# Altium PCB BombasFSM.PcbDoc
Units mm, origin at the board's own origin, x right, y up, seen from the top; angles counter-clockwise.
Board outline 100 x 100 mm, 2 copper layers (Top Layer, Bottom Layer); 27 components, 19 nets, 140 pads, 39 vias.
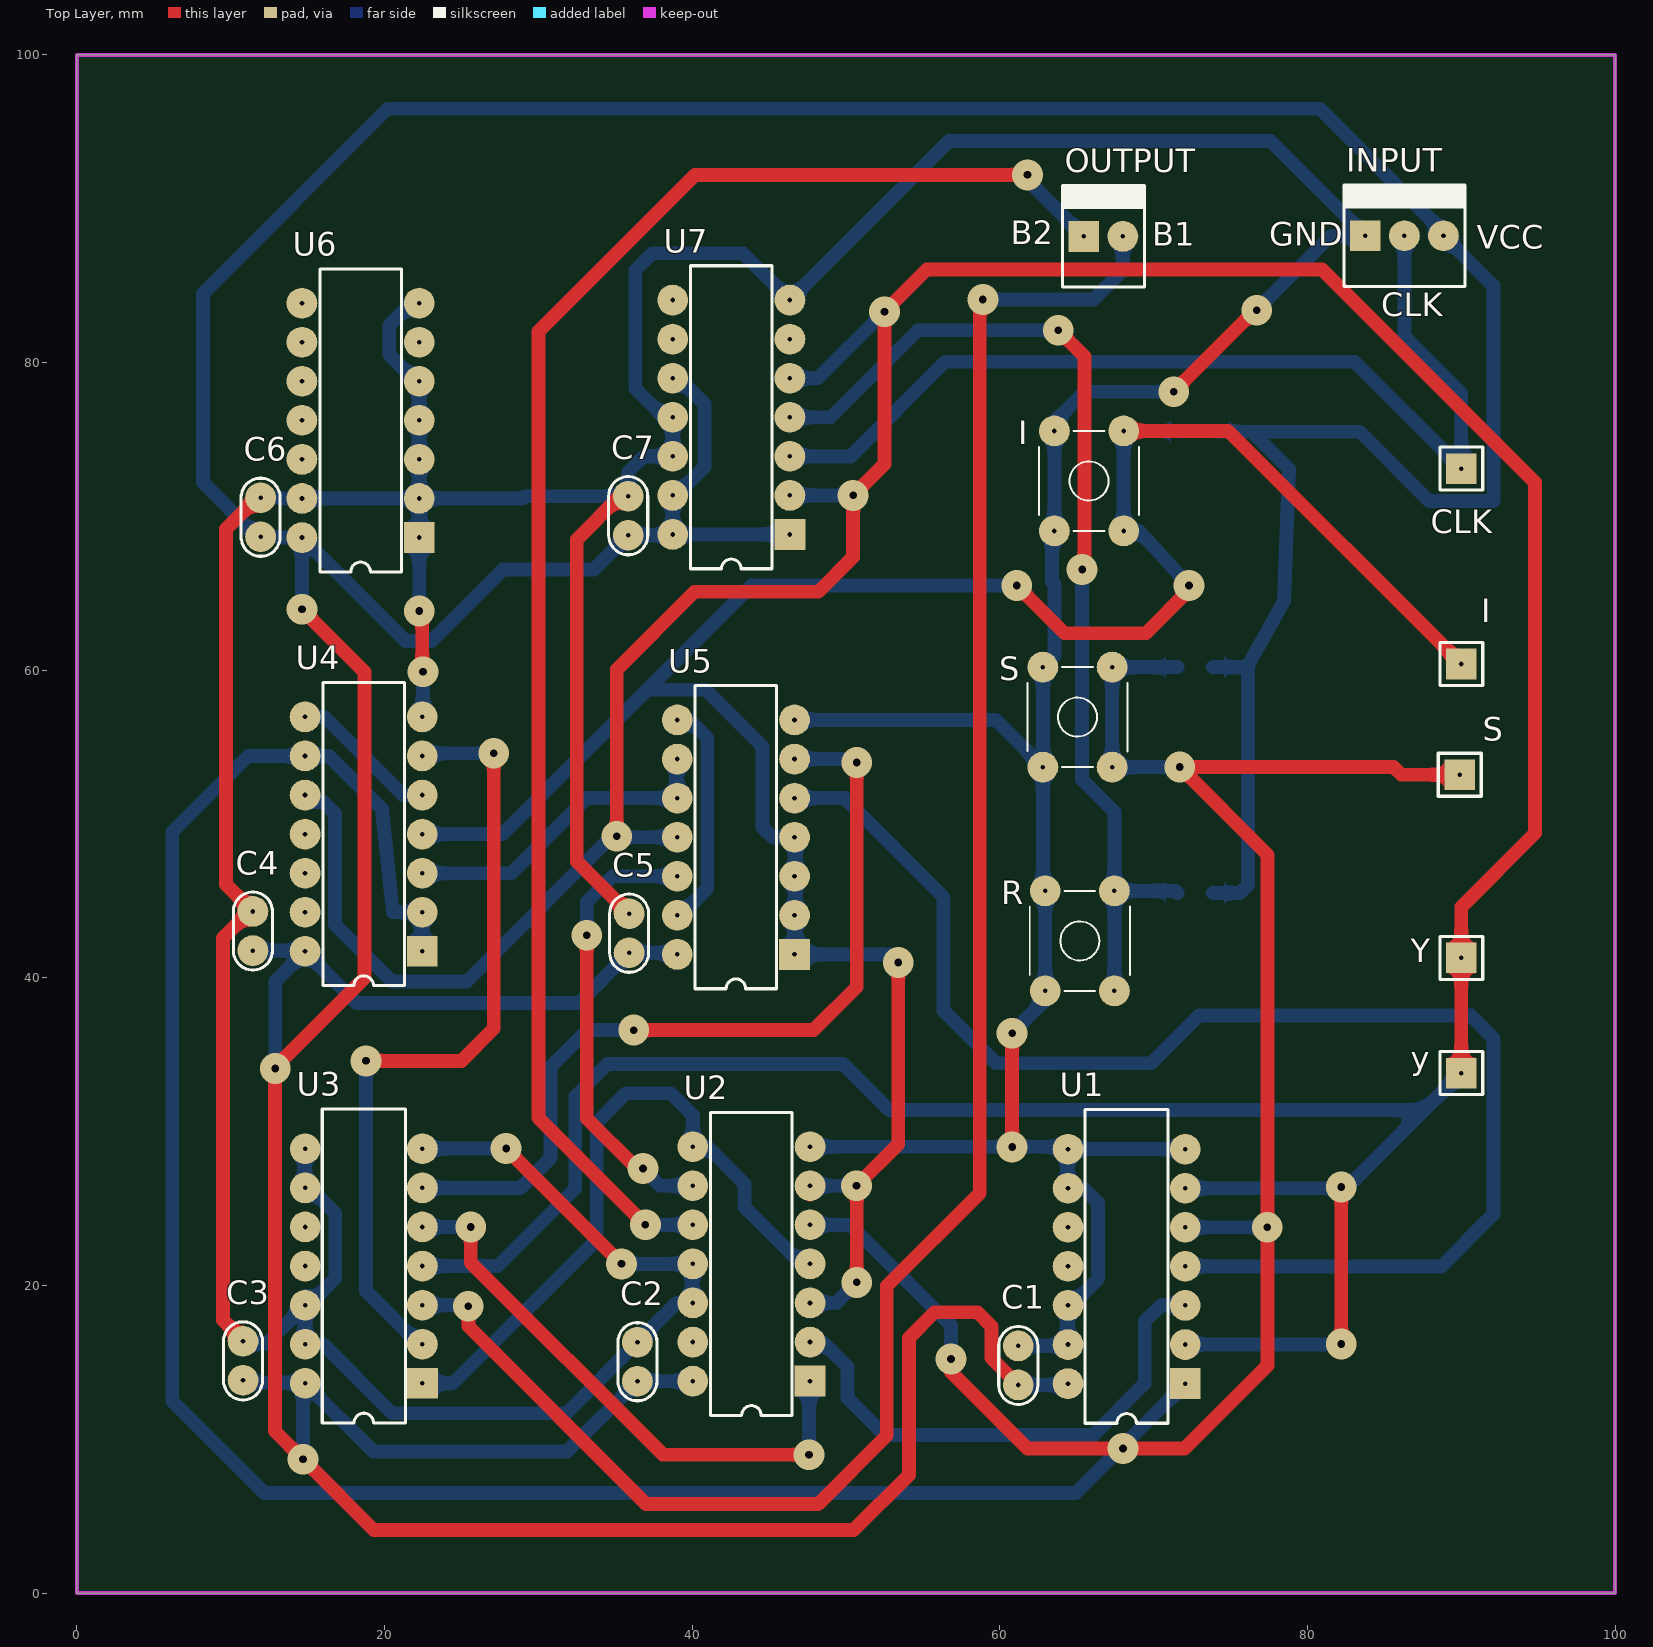
[diagram p0: Top Layer view]
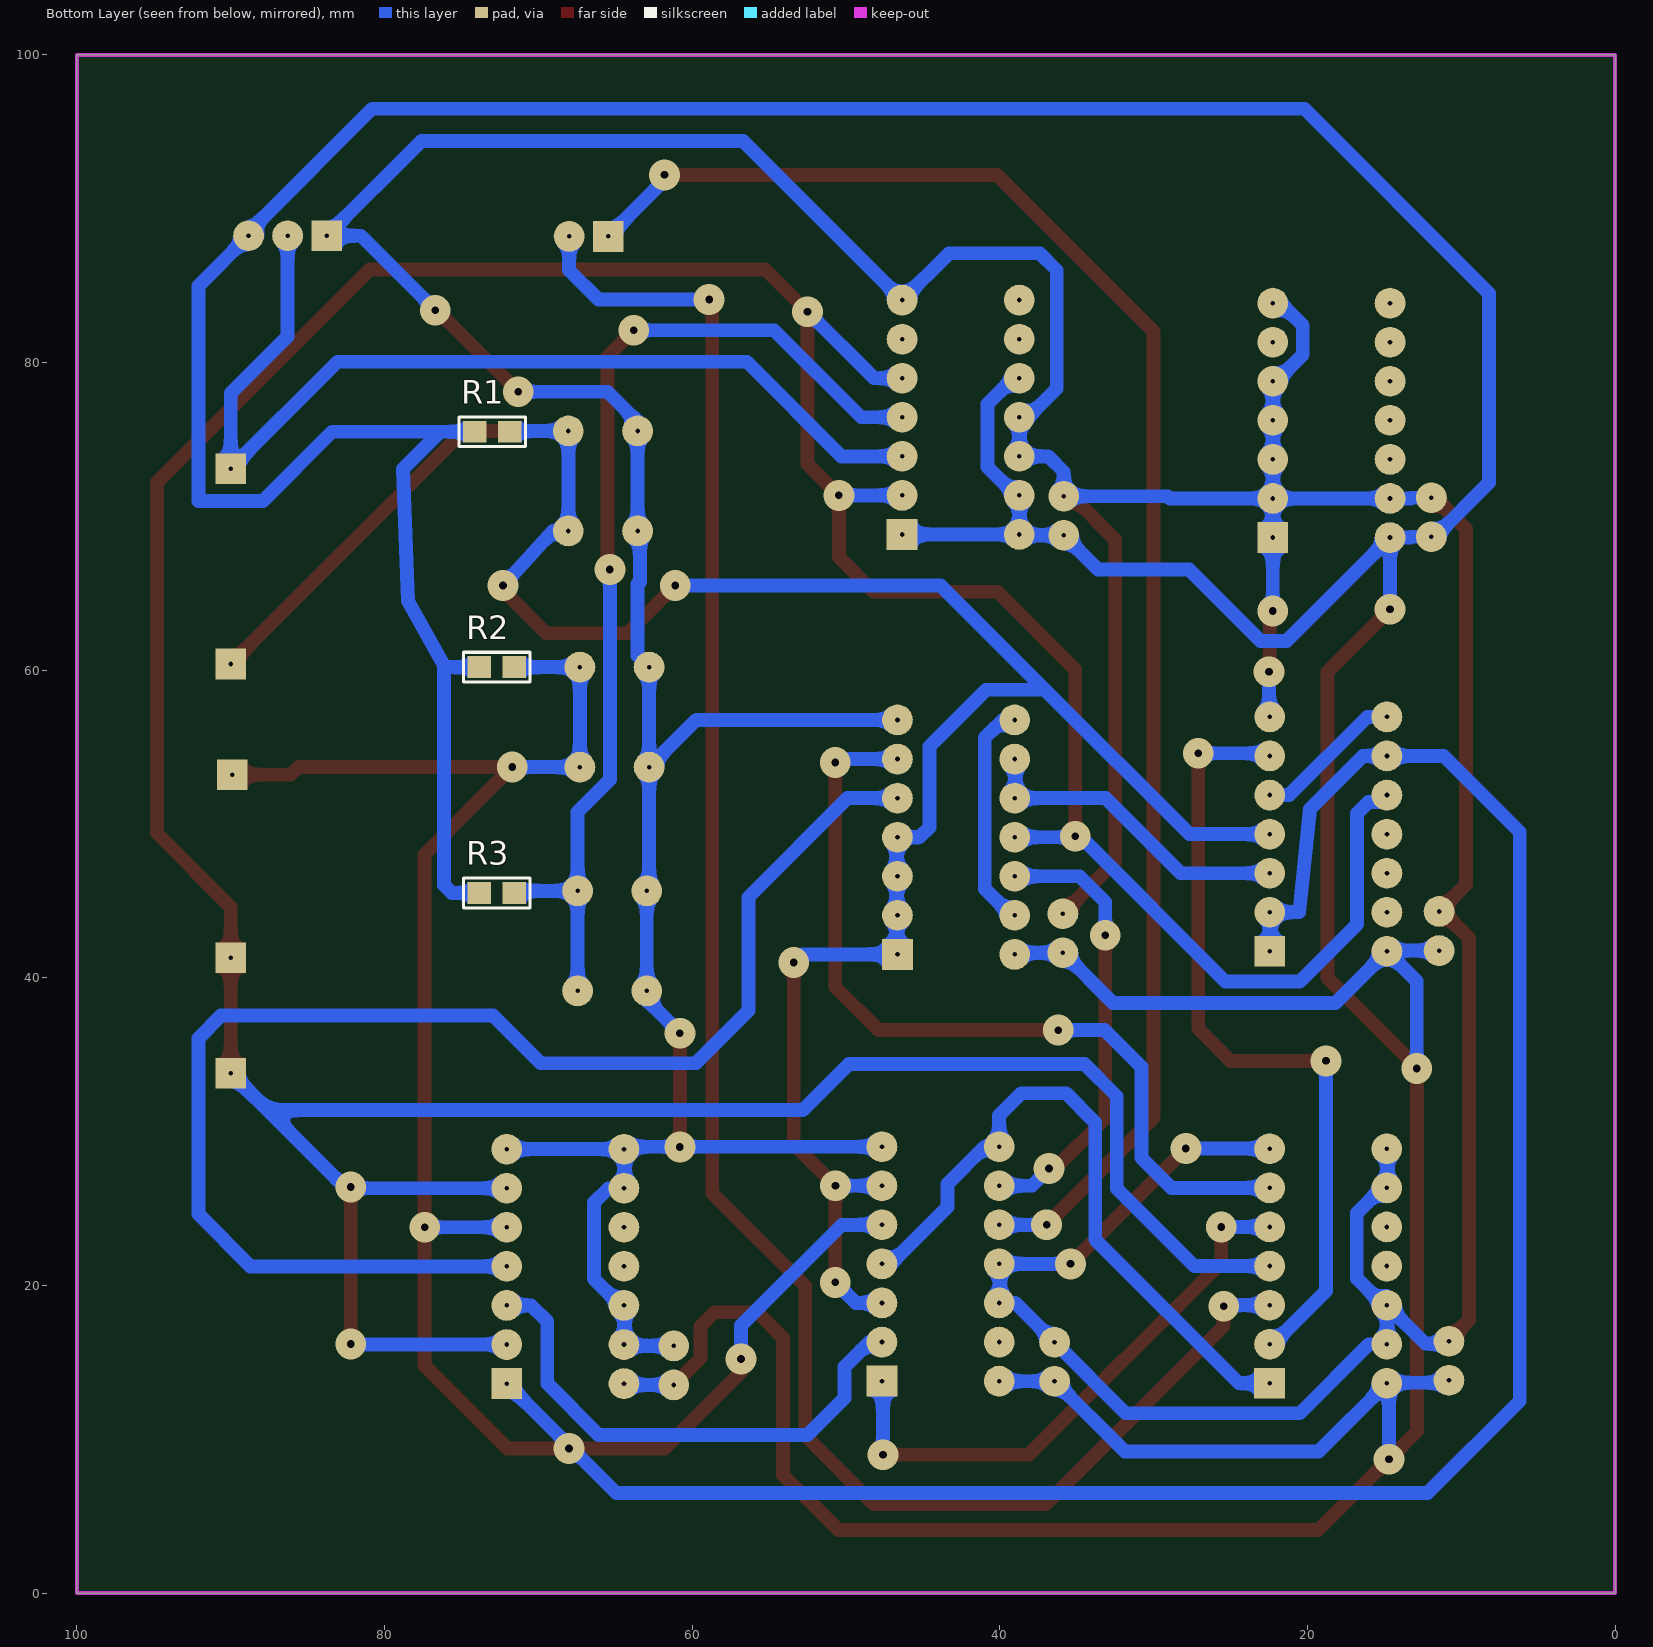
[diagram p1: Bottom Layer view, seen from below]
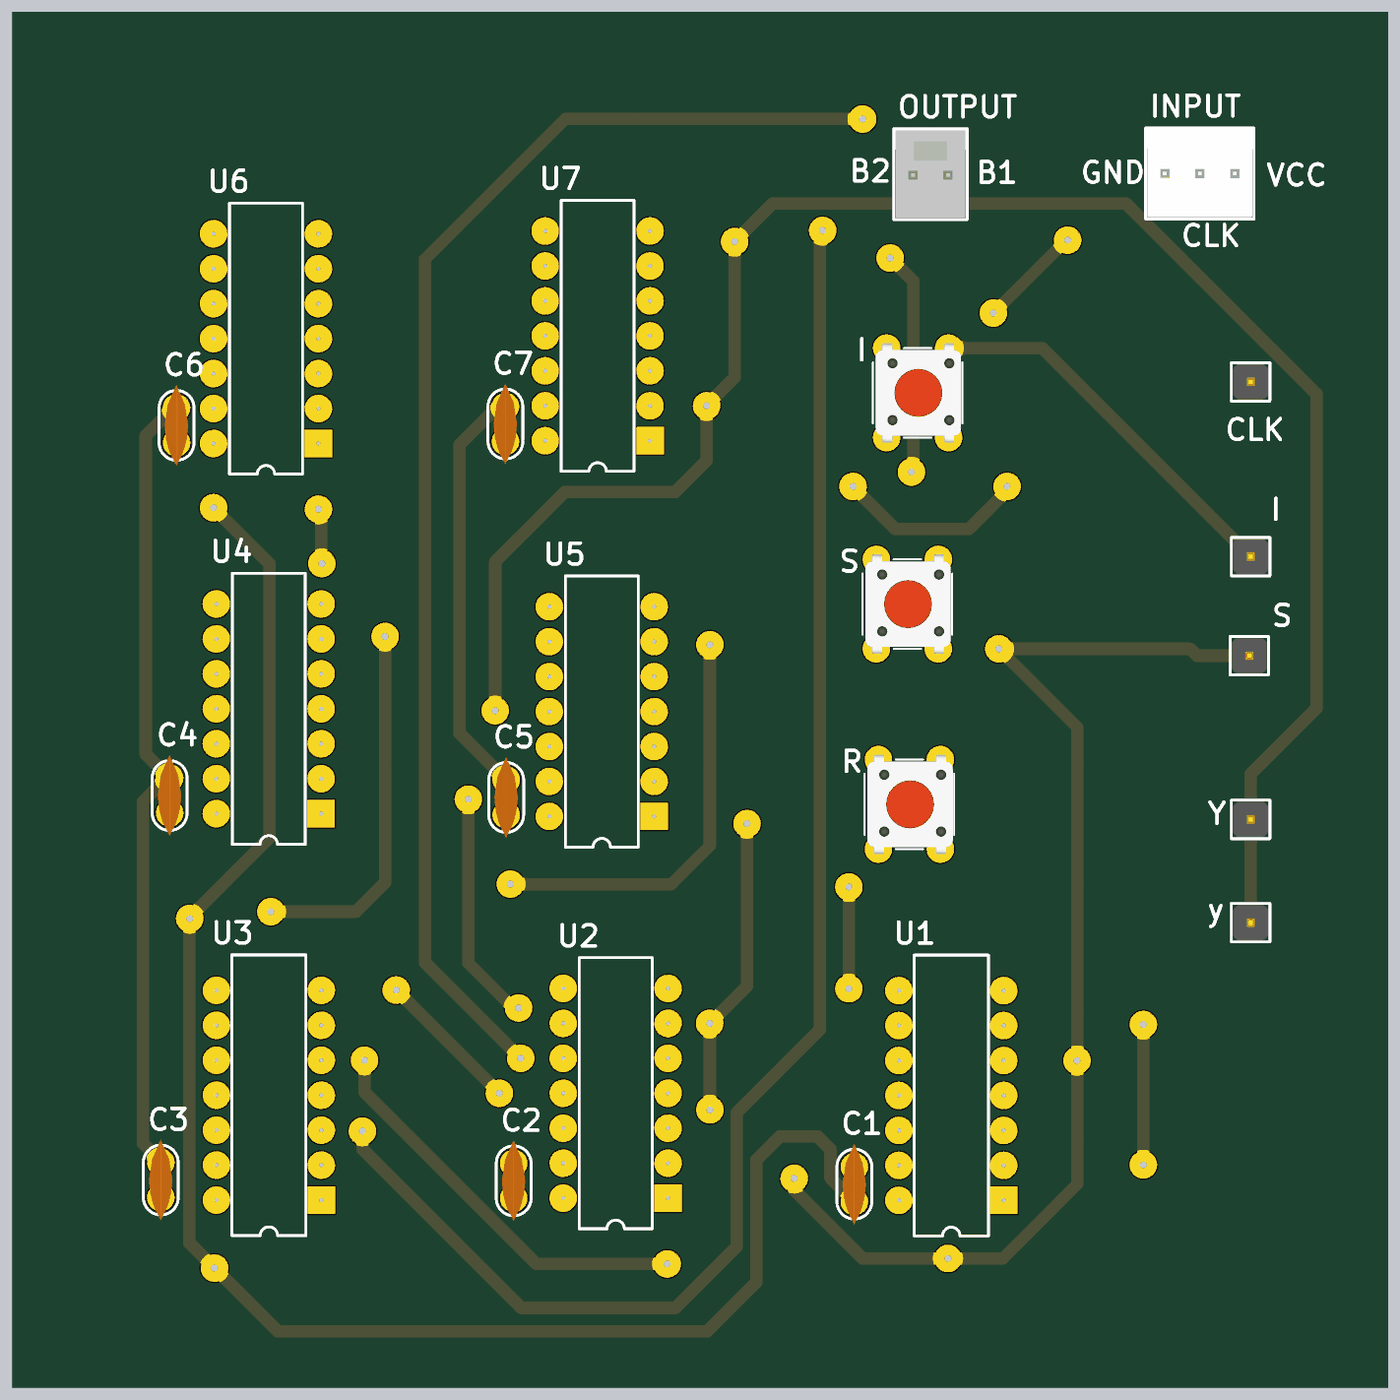
[diagram p2: 3D render of the assembled board from above, using the file's embedded part models]
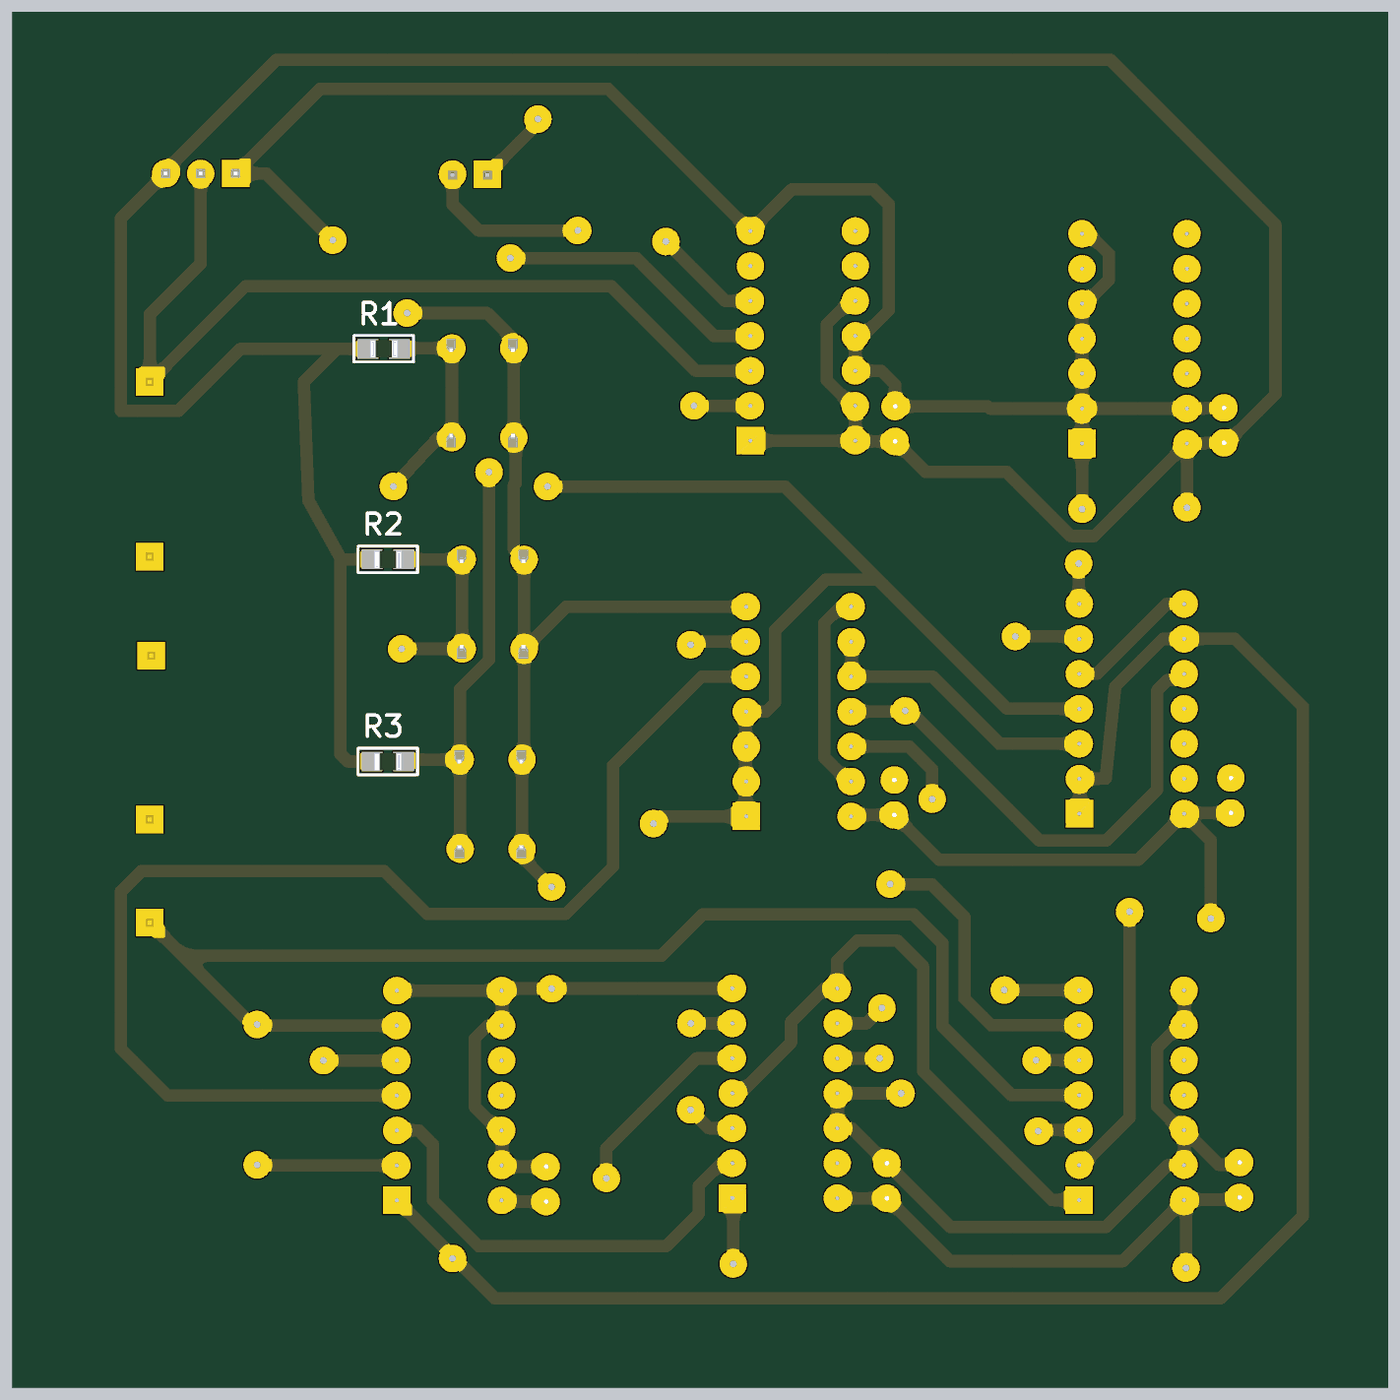
[diagram p3: 3D render of the assembled board from below, using the file's embedded part models]

## Layer stack, top to bottom
Top Solder: solder mask 0.0102, Solder Resist, Dk 3.5
Top Layer: signal copper 0.0356
Dielectric 1: dielectric 0.32, FR-4, Dk 4.8
Bottom Layer: signal copper 0.0356
Bottom Solder: solder mask 0.0102, Solder Resist, Dk 3.5

## Board outline
0,0 100,0 100,100 0,100

## Design rules (kind name [scope] priority, off if disabled: settings)
Clearance [All] p1: gap=0.5 ignorepadtopadclearanceinfootprint=FALSE
PolygonConnect [All] p1: connectstyle=Relief reliefconductorwidth=0.254 reliefentries=4 polygonreliefangle="90 Angle" airgapwidth=0.254
RoutingVias [All] p1: holewidth=0.3 width=2 viastyle="Through Hole" minholewidth=0.3 minwidth=1.5 maxholewidth=0.5 maxwidth=3
SolderMaskExpansion [All] p1: expansion=0.102
Width [All] p1: maxlimit=0.9 minlimit=0.6 preferedwidth=0.9
30 further rules are at their usual default settings.

## Classes and differential pairs
component class BombasFSM: C1 C2 C3 C4 C5 C6 C7 CLK I INPUT OUTPUT R R1 R2 R3 S U1 U2 U3 U4 U5 U6 U7 y Y

## Components (designator, comment, footprint, x,y, rotation, side; value= is the part's Value field where it differs from the comment)
C1 "100n" CAP100 61.2,14.8 r90 top
C2 "100n" CAP100 36.443,15.042 r90 top
C3 "100n" CAP100 10.8,15.1 r90 top
C4 "100n" CAP100 11.443,43.042 r90 top
C5 "100n" CAP100 35.9,42.9 r90 top
C6 "100n" CAP100 11.943,69.942 r90 top
C7 "100n" CAP100 35.843,70.042 r90 top
CLK "CLK" TPTH 90,73.1 r0 top
I "I" TPTH 90,60.4 r0 top
I "I BUTTON" TACTSWITCH 65.8,72.3 r0 top value=PULSADOR
INPUT "MOLEX3" MOLEX3 83.763,88.242 r0 top (schematic designator J1)
OUTPUT "MOLEX2" MOLEX2 65.46,88.2 r0 top (schematic designator J2)
R "RESET BUTTON" TACTSWITCH 65.2,42.4 r0 top value=PULSADOR
R1 "100K" 0805 73,75.5 r0 bottom
R2 "100K" 0805 72.7,60.2 r0 bottom
R3 "100K" 0805 72.7,45.512 r0 bottom
S "S" TPTH 89.9,53.2 r0 top
S "S BUTTON" TACTSWITCH 65.05,56.95 r0 top value=PULSADOR
U1 "MC14070BCL" 632-08 68.243,21.242 r90 top
U2 "MC74HC02AN" 646-06 43.853,21.402 r90 top
U3 "MC14071BCL" 632-08 18.653,21.262 r90 top
U4 "MC74HC00AN" 646-06 18.643,49.342 r90 top
U5 "MC74HC11N" 646-06 42.843,49.142 r90 top
U6 "MC74HC11N" 646-06 18.443,76.242 r90 top
U7 "SN74LS74AN" N014D 42.543,76.442 r90 top value=74LS74
y "y" TPTH 90,33.8 r0 top
Y "Y" TPTH 90,41.3 r0 top

## Footprints (in the part's own frame and the unit in brackets; to place one, negate y for a bottom-side part, rotate by r counter-clockwise, add the part's x,y. Pads: shape width x height; smd on the part's side, far side on the other; paste and mask are expansions set on the pad)
632-08 [mm] "DIP; 14 Leads; Row Spacing 7.62 mm; Pitch 2.54 mm"
  rect 2x2 hole 0.3: 1(-7.62,-3.81)
  round 2 hole 0.3: 2(-5.08,-3.81) 3(-2.54,-3.81) 4(0,-3.81) 5(2.54,-3.81) 6(5.08,-3.81) 7(7.62,-3.81) 8(7.62,3.81) 9(5.08,3.81) 10(2.54,3.81) 11(0,3.81) 12(-2.54,3.81) 13(-5.08,3.81) 14(-7.62,3.81)
  silkscreen extent -10.2,-2.7 10.2,2.7
646-06 [mm] "DIP; 14 Leads; Row Spacing 7.62 mm; Pitch 2.54 mm"
  rect 2x2 hole 0.3: 1(-7.62,-3.81)
  round 2 hole 0.3: 2(-5.08,-3.81) 3(-2.54,-3.81) 4(0,-3.81) 5(2.54,-3.81) 6(5.08,-3.81) 7(7.62,-3.81) 8(7.62,3.81) 9(5.08,3.81) 10(2.54,3.81) 11(0,3.81) 12(-2.54,3.81) 13(-5.08,3.81) 14(-7.62,3.81)
  silkscreen extent -9.85,-2.65 9.85,2.65
0805 [mil] "Pasivo 0805"
  rect 60x56 smd: 1(-45,0) 2(45,0)
  silkscreen extent -85,-38 85,38, body extent -39,-25 39,25, height 15
CAP100 [mm]
  round 2 hole 0.3: 1(-1.27,0) 2(1.27,0)
  silkscreen extent -2.54,-1.27 2.54,1.27, body extent -2.92,-0.84 2.92,0.86, height 6.12
MOLEX2 [mm]
  rect 2x2 hole 0.3: 1(0,0)
  round 2 hole 0.3: 2(2.54,0)
  silkscreen extent -1.4,-3.3 3.94,3.3, body extent -1.27,-3.17 3.81,3.17, height 10.74
MOLEX3 [mm]
  rect 2x2 hole 0.3: 1(0,0)
  round 2 hole 0.3: 2(2.54,0) 3(5.08,0)
  silkscreen extent -1.4,-3.3 6.48,3.3, body extent -1.27,-3.17 6.35,3.17, height 10.74
N014D [mm] "DIP; 14 Leads; Row Spacing 7.62 mm; Pitch 2.54 mm"
  rect 2x2 hole 0.3: 1(-7.62,-3.81)
  round 2 hole 0.3: 2(-5.08,-3.81) 3(-2.54,-3.81) 4(0,-3.81) 5(2.54,-3.81) 6(5.08,-3.81) 7(7.62,-3.81) 8(7.62,3.81) 9(5.08,3.81) 10(2.54,3.81) 11(0,3.81) 12(-2.54,3.81) 13(-5.08,3.81) 14(-7.62,3.81)
  silkscreen extent -9.85,-2.65 9.85,2.65
TACTSWITCH [mm]
  round 2 hole 0.3: 1(-2.25,-3.25) 2(-2.25,3.25) 3(2.25,-3.25) 4(2.25,3.25)
  silkscreen extent -3.25,-3.25 3.25,3.25, body extent -3.05,-3.95 3.15,3.95, height 7
TPTH [mm]
  rect 2x2 hole 0.3: 1(0,0)
  silkscreen extent -1.4,-1.4 1.4,1.4, body extent -1.27,-1.27 1.27,1.27, height 6.04

## Part data
C1 C2 C3 C4 C5 C6 C7: library part CAP
CLK I S y Y: library part TP
I R S: library part "TACT SWITCH"
R1 R2 R3: library part RES
U1: "Quad XOR Gate", ComponentLink1Description="Manufacturer Link", ComponentLink1URL=http://www.onsemi.com/, ComponentLink2Description=Datasheet, ComponentLink2URL=http://www.onsemi.com/pub/Collateral/MC14070B-D.PDF, DatasheetVersion=1995, PackageDescription="DIP; 14 Leads; Row Spacing 7.62 mm; Pitch 2.54 mm", PackageReference=632-08, PackageVersion=1995, Published=15-Apr-2002, Publisher="Altium Limited"
U2: "Quad 2-Input NOR Gate", ComponentLink1Description="Manufacturer Link", ComponentLink1URL=http://www.onsemi.com/site/products/parametrics/0,4446,247,00.html, ComponentLink2Description="Ibis Model", ComponentLink2URL=http://www.onsemi.com/pub/Collateral/MC54HC02AJ.IBS, DatasheetVersion=1989, LatestRevisionDate=06-Jun-2005, LatestRevisionNote="Stylized 3D Model Added", PackageDescription="DIP; 14 Leads; Row Spacing 7.62 mm; Pitch 2.54 mm", PackageReference=646-06, PackageVersion=1997, Published=17-Jul-2002, Publisher="Altium Limited"
U3: "Quad 2-Input OR Gate", ComponentLink1Description="Manufacturer Link", ComponentLink1URL=http://www.onsemi.com/, ComponentLink2Description=Datasheet, ComponentLink2URL=http://www.onsemi.com/pub/Collateral/MC14001B-D.PDF, DatasheetVersion=1995, PackageDescription="DIP; 14 Leads; Row Spacing 7.62 mm; Pitch 2.54 mm", PackageReference=632-08, PackageVersion=1995, Published=15-Apr-2002, Publisher="Altium Limited"
U4: "Quad 2-Input NAND Gate", ComponentLink1Description="Manufacturer Link", ComponentLink1URL=http://www.onsemi.com/site/products/parametrics/0,4446,247,00.html, ComponentLink2Description="Ibis Model", ComponentLink2URL=http://www.onsemi.com/pub/Collateral/MC54HC00AJ.IBS, DatasheetVersion=1989, LatestRevisionDate=06-Jun-2005, LatestRevisionNote="Stylized 3D Model Added", PackageDescription="DIP; 14 Leads; Row Spacing 7.62 mm; Pitch 2.54 mm", PackageReference=646-06, PackageVersion=1997, Published=17-Jul-2002, Publisher="Altium Limited"
U5 U6: "Triple 3-Input AND Gate", ComponentLink1Description="Manufacturer Link", ComponentLink1URL=http://www.onsemi.com/site/products/parametrics/0,4446,247,00.html, ComponentLink2Description="Ibis Model", ComponentLink2URL=http://www.onsemi.com/pub/Collateral/MC54HC11J.IBS, DatasheetVersion=1989, LatestRevisionDate=06-Jun-2005, LatestRevisionNote="Stylized 3D Model Added", PackageDescription="DIP; 14 Leads; Row Spacing 7.62 mm; Pitch 2.54 mm", PackageReference=646-06, PackageVersion=1997, Published=17-Jul-2002, Publisher="Altium Limited"
U7: "Dual D-Type Positive-Edge-Triggered Flip-Flop with Preset and Clear"

## Via types
v1: diameter 2, hole 0.5, Top Layer to Bottom Layer, 39 vias

## Nets (pads, with @x,y where several pads share a name; then routed paths per layer and width w, separated by ;. In a path a pad name is that pad's centre, name@x,y a point inside that pad or via, vN(x,y) a via of type N, cw(c..) or ccw(c..) an arc to the next point about the centre after c; other vN are vias at no path point)
B1: OUTPUT.2 U3.3 | length 126.7
  Top Layer w0.9: v1(25.45,18.65) 25.45,17.35 37,5.8 48.2,5.8 52.65,10.25 52.65,19.97 58.699,26.02 58.699,83.199 58.9,83.4 v1(58.9,84.1)
  Bottom Layer w0.9: U3.3 25.378,18.722 v1(25.45,18.65) ; v1(58.9,84.1) 66.1,84.1 68,86 OUTPUT.2
B2: OUTPUT.1 U2.10 | length 105.6
  Top Layer w0.9: v1(36.957,23.942) 30,30.899 30,82.019 40.181,92.2 v1(61.8,92.2)
  Bottom Layer w0.9: v1(36.957,23.942) U2.10 ; v1(61.8,92.2) 61.8,91.86 OUTPUT.1
CLK: CLK.1 INPUT.2 U7.3 | length 65.7
  Bottom Layer w0.9: U7.3 50.302,73.902 56.45,80.05 83.05,80.05 CLK.1 90,78 86.303,81.697 INPUT.2
GND: C1.2 C2.2 C3.2 C4.2 C5.2 C6.2 C7.2 I.1@63.55,69.05 I.2 INPUT.1 R.1 R.2 S.1@62.8,53.7 S.2 U1.7 U1.8 U1.9 U1.12 U1.13 U2.7 U2.11 U2.12 U3.7 U3.8 U3.9 U3.12 U3.13 U4.7 U5.7 U6.1 U6.2 U6.3 U6.4 U6.5 U6.7 U6.13 U7.7 U7.11 U7.12 | length 422.3
  Top Layer w0.9: C3.2@11.043,16.212 9.493,17.762 9.493,42.58 11.225,44.312 C4.2 9.7,46.055 9.7,69.187 11.725,71.212 C6.2 ; v1@22.453,63.847 22.453,60.547 22.5,60.5 v1(22.5,59.9) ; v1(27.904,28.9) v1(35.402,21.402) ; C7.2 35.312,71.312 32.5,68.5 32.5,47.57 C5.2 ; v1(60.8,29) v1(60.8,36.4) ; v1(71.3,78.1) 76.6,83.4 v1(76.7,83.4)
  Bottom Layer w0.9: C3.2@11.043,16.212 12.333,16.212 U3.12@14.8,18.679 ; C6.2 13.259,71.212 13.309,71.162 U6.13 U6.2 ; U3.12@14.8,18.68 U3.12 ; U3.8 14.8,28.94 14.8,26.4 U3.9 15.158,26.342 16.793,24.707 16.793,20.454 15.651,19.312 14.843,19.312 U3.12 ; v1(22.253,63.847) U6.1 U6.2 ; U6.7 21.762,83.862 20.303,82.403 20.303,80.514 22.035,78.782 U6.5 U6.4 U6.3 U6.2 ; U4.7 22.5,57.009 v1(22.5,59.9) ; U3.7 22.481,28.9 v1(27.904,28.9) ; v1(35.402,21.402) U2.11 40,21.359 40,18.862 U2.12 ; 38.993,18.862 C2.2 31.823,11.692 20.498,11.692 16.008,16.182 U3.13 14.843,16.205 U3.12@14.8,18.679 ; U5.7 59.738,56.762 S.1@62.8,53.7 ; U2.7 64.23,29.022 U1.8@64.39,28.862 ; v1(60.8,36.4) 62.95,38.55 R.1 R.2 62.8,45.8 S.1@62.8,53.7 ; C1.2 64.341,16.07 U1.13 64.39,16.205 64.39,18.659 U1.12 64.651,18.702 66.383,20.434 66.383,25.383 65.444,26.322 U1.9 64.39,26.38 U1.8@64.39,28.862 ; v1(71.3,78.1) 65.5,78.1 63.55,76.15 I.2 63.55,69.05 63.4,68.9 63.4,65.742 63.55,65.592 63.55,60.95 S.2 S.1@62.8,53.7 ; U1.7 U1.8 ; v1(76.7,83.4) 81.542,88.242 INPUT.1 77.605,94.4 56.691,94.4 U7.7 43.315,87.1 37.4,87.1 36.3,86 36.3,78.3 38.158,76.442 U7.11 U7.12 36.847,73.902 35.843,72.898 C7.2 29.106,71.312 28.956,71.162 U6.2 ; U3.12@14.8,18.679 U3.12 ; U1.8@64.39,28.862 64.39,28.92 U1.8 ; U1.8@64.39,28.862 U1.8
I: I.1@90,60.4 I.3 I.4 R1.1 U2.3 U2.6 U4.4 U5.1 U5.2 U5.3 U5.4 | length 177.3
  Top Layer w0.9: U2.6@47.663,25.908 U2.6 ; v1(50.682,26.482) v1@50.7,26.5 ; v1(50.7,20.2) v1@50.7,26.5 ; v1(53.4,41) 53.4,29.2 v1@50.7,26.5 ; v1(61.1,65.5) 64.2,62.4 69.5,62.4 72.3,65.2 v1(72.3,65.5) ; I.4 74.85,75.55 I.1@90,60.4
  Bottom Layer w0.9: U4.4 27.676,49.342 ; U2.3 49.362,18.862 v1(50.7,20.2) ; U2.6 v1(50.682,26.482) ; v1(53.4,41) 52.878,41.522 U5.1 46.71,41.579 46.71,49.085 U5.4 45.212,49.142 44.577,49.777 44.577,55.042 40.894,58.725 37.069,58.725 ; v1(61.1,65.5) 43.844,65.5 37.069,58.725 ; R1.1 71.807,75.55 I.4 I.3 69.05,69.05 v1(72.3,65.5) ; 27.676,49.342 37.059,58.725 37.069,58.725 ; 27.676,49.342 27.686,49.342 37.069,58.725
NetU1_3: U1.3 U2.2 | length 33.9
  Bottom Layer w0.9: U2.2 48.478,16.322 50.1,14.7 50.1,12.687 52.5,10.287 66.091,10.287 69.418,13.614 69.418,17.653 70.467,18.702 U1.3
NetU1_4: U1.4 U5.5 | length 91.7
  Bottom Layer w0.9: U5.5 49.893,51.682 56.337,45.237 56.337,37.863 59.75,34.45 69.86,34.45 72.952,37.541 90.627,37.541 92.1,36.068 92.1,24.638 88.704,21.242 U1.4
NetU2_1: U2.1 U3.5 | length 37.3
  Top Layer w0.9: v1@25.6,23.5 25.6,21.5 38.1,9 v1(47.6,9) ; v1(25.602,23.802) v1@25.7,23.9
  Bottom Layer w0.9: U3.5 v1(25.602,23.802) ; v1(47.6,9) 47.6,13.719 U2.1
NetU2_9: U2.9 U5.12 | length 29.4
  Top Layer w0.9: v1(33.147,42.774) 33.147,30.861 36.408,27.6 v1(36.8,27.6)
  Bottom Layer w0.9: v1(33.147,42.774) 33.147,44.933 34.816,46.602 U5.12 ; v1(36.8,27.6) 37.918,26.482 U2.9
NetU3_2: U3.2 U4.6 | length 51.9
  Top Layer w0.9: v1(18.8,34.6) 25,34.6 27.1,36.7 v1(27.1,54.6)
  Bottom Layer w0.9: v1(18.8,34.6) 18.8,19.627 22.245,16.182 U3.2 ; U4.6 22.631,54.6 v1(27.1,54.6)
NetU3_6: U3.6 U5.6 | length 55.8
  Top Layer w0.9: v1(36.2,36.6) 47.9,36.6 50.7,39.4 v1(50.7,54)
  Bottom Layer w0.9: U3.6 28.842,26.342 30.8,28.3 30.8,34.2 33.2,36.6 v1(36.2,36.6) ; U5.6 50.478,54.222 v1(50.7,54)
NetU4_3: U4.3 U5.9 U5.10 | length 21.2
  Bottom Layer w0.9: U4.3 28.258,46.802 33.138,51.682 U5.10@38.99,51.682 ; U5.10 U5.10@38.99,51.682 ; U5.9 38.99,54.179 U5.10@38.99,51.682
NetU4_5: U4.5 U4.8 | length 9.7
  Bottom Layer w0.9: U4.8 16.114,56.962 21.194,51.882 U4.5
NetU5_8: U5.8 U5.13 | length 14.9
  Bottom Layer w0.9: U5.13 39.251,44.062 40.983,45.794 40.983,55.583 39.804,56.762 U5.8
RESET: R3.1 R.3 R.4 U7.4 | length 68.5
  Top Layer w0.9: v1(63.8,82.1) 65.5,80.4 v1@65.5,66.55
  Bottom Layer w0.9: U7.4 49.01,76.442 54.668,82.1 v1(63.8,82.1) ; v1(65.35,66.55) 65.35,52.892 67.45,50.792 R.4 ; R.3 R.4 ; R3.1 71.419,45.65 R.4
S: R2.1 S.1@89.9,53.2 S.3 S.4 U1.1 U1.5 U2.5 U4.1 U4.2 U4.9 | length 256.7
  Top Layer w0.9: v1(56.825,15.22) 56.825,14.375 61.802,9.398 v1(68.002,9.398) 71.998,9.398 77.4,14.8 v1@77.4,23.8 ; v1(77.382,23.782) v1@77.4,23.8 ; 77.4,25 v1@77.4,23.8 ; 77.4,25.248 77.4,48 v1(71.7,53.7) 85.6,53.7 86.1,53.2 S.1@89.9,53.2 ; v1@77.7,24.1 v1@77.4,23.8
  Bottom Layer w0.9: U4.1 22.41,41.78 U4.2@22.41,44.262 ; U4.2 U4.2@22.41,44.262 ; U2.5 50.277,23.942 56.825,17.394 v1(56.825,15.22) ; R2.1 S.4 S.3 v1(71.7,53.7) ; U1.1 64.938,6.507 12.187,6.507 6.2,12.494 6.2,49.482 11.14,54.422 U4.9 16.393,54.422 19.843,50.972 20.539,44.262 U4.2@22.41,44.262 ; U1.5 v1(77.382,23.782)
S+I: U2.4 U2.8 U3.1 | length 44.1
  Bottom Layer w0.9: U3.1 24.442,13.642 33.8,23 33.8,30.6 35.7,32.5 38.6,32.5 40.043,31.057 U2.8 40.978,29.022 43.4,26.6 43.4,25.1 47.098,21.402 U2.4
VCC: C1.1 C2.1 C3.1 C4.1 C5.1 C6.1 C7.1 INPUT.3 R1.2 R2.2 R3.2 U1.14 U2.14 U3.14 U4.14 U5.14 U6.14 U7.1 U7.10 U7.13 U7.14 | length 441.4
  Top Layer w0.9: v1(12.9,34.1) v1@12.878,34.078 ; v1(14.633,63.956) 18.7,59.889 18.7,40 12.878,34.178 v1@12.878,34.078 ; v1@14.893,8.507 v1(14.7,8.7) ; v1@15,8.3 14.7,8.6 v1(14.7,8.7) ; v1@15.05,8.35 19.3,4.1 50.5,4.1 54.087,7.687 54.087,16.587 55.757,18.257 58.547,18.257 59.463,17.341 59.463,15.267 C1.1 ; v1@12.878,34.078 12.878,10.522 v1(14.7,8.7)
  Bottom Layer w0.9: C3.1@10.8,13.672 14.813,13.672 U3.14 ; C4.1 14.783,41.772 U4.14 ; v1(12.9,34.1) 12.9,39.789 U4.14 ; v1(14.633,63.956) U6.14 ; v1(14.7,8.7) 14.7,13.499 U3.14 ; U7.10 39.118,78.982 40.8,77.3 40.8,73.211 38.951,71.362 U7.13 U7.14 ; U5.14 38.925,41.63 C5.1 32.642,38.372 18.183,38.372 U4.14 ; U2.14 40.033,13.772 C2.1 31.871,9.2 19.285,9.2 U3.14 ; U7.1 U7.14 ; C1.1 64.341,13.53 U1.14 ; R3.2 75.612,45.512 76.143,46.043 76.143,60.3 ; R2.2 76.043,60.2 76.143,60.3 ; R1.2 83.402,75.5 87.909,70.993 92.1,70.993 92.1,84.985 INPUT.3 88.253,88.242 88.253,89.05 80.803,96.5 20.2,96.5 8.197,84.497 8.197,72.2 11.725,68.672 C6.1 13.259,68.672 13.309,68.622 U6.14 ; 76.5,75.4 78.808,73.092 78.476,64.49 76.143,60.3 ; U6.14 21.358,61.897 23.061,61.897 27.712,66.548 33.619,66.548 C7.1 38.683,68.772 U7.14
y: U1.2 U1.6 U3.4 U4.10 U5.11 U7.2 U7.5 Y.1 y.1 | length 301.1
  Top Layer w0.9: v1(35.1,49.2) 35.1,60.041 40.159,65.1 48.2,65.1 50.462,67.362 v1(50.462,71.362) 52.5,73.4 v1(52.5,83.3) 55.25,86.05 80.95,86.05 94.8,72.2 94.8,49.4 90,44.6 Y.1 y.1 ; v1(82.2,16.2) v1(82.2,26.4)
  Bottom Layer w0.9: U4.10 15.28,51.435 16.027,51.435 16.789,50.673 16.789,43.48 20.498,39.772 25.345,39.772 34.715,49.142 v1@35.042,49.142 ; U3.4 27.362,21.262 32.4,26.3 32.4,32.3 34.5,34.4 49.807,34.4 52.807,31.4 87.6,31.4 ; v1@34.8,48.9 v1@35.042,49.142 ; v1(35.1,49.2) v1@35.042,49.142 ; U5.11 v1@35.042,49.142 ; U7.2 v1(50.462,71.362) ; U7.5 48.182,78.982 v1(52.5,83.3) ; U1.2 82.162,16.162 v1(82.2,16.2) ; U1.6 v1@82.1,26.322 ; v1@82.1,26.5 v1(82.2,26.4) 82.6,26.4 y.1@89.3,33.1
pads on no net: U1.10 U1.11 U2.13 U3.10 U3.11 U4.11 U4.12 U4.13 U6.6 U6.8 U6.9 U6.10 U6.11 U6.12 U7.6 U7.8 U7.9

## Keep-outs
Keep-Out Layer:
  the board outline again, w0.254

## Silkscreen, mask and mechanical layers (free items; w line width, h text height)
Top Overlay:
  text "B2" at 60.7,87.7 h1.52
  text "B1" at 69.9,87.6 h1.52
  text "GND" at 77.5,87.6 h1.52
  text "VCC" at 91,87.4 h1.52
  text "CLK" at 84.8,83 h1.52